# Altium PCB MasterRelayModule.PcbDoc
Units mil, origin at the board's own origin, x right, y up, seen from the top; angles counter-clockwise.
Board outline 2917.32 x 2165.35 mil, 2 copper layers (Top Layer, Bottom Layer); 52 components, 45 nets, 197 pads, 35 vias.
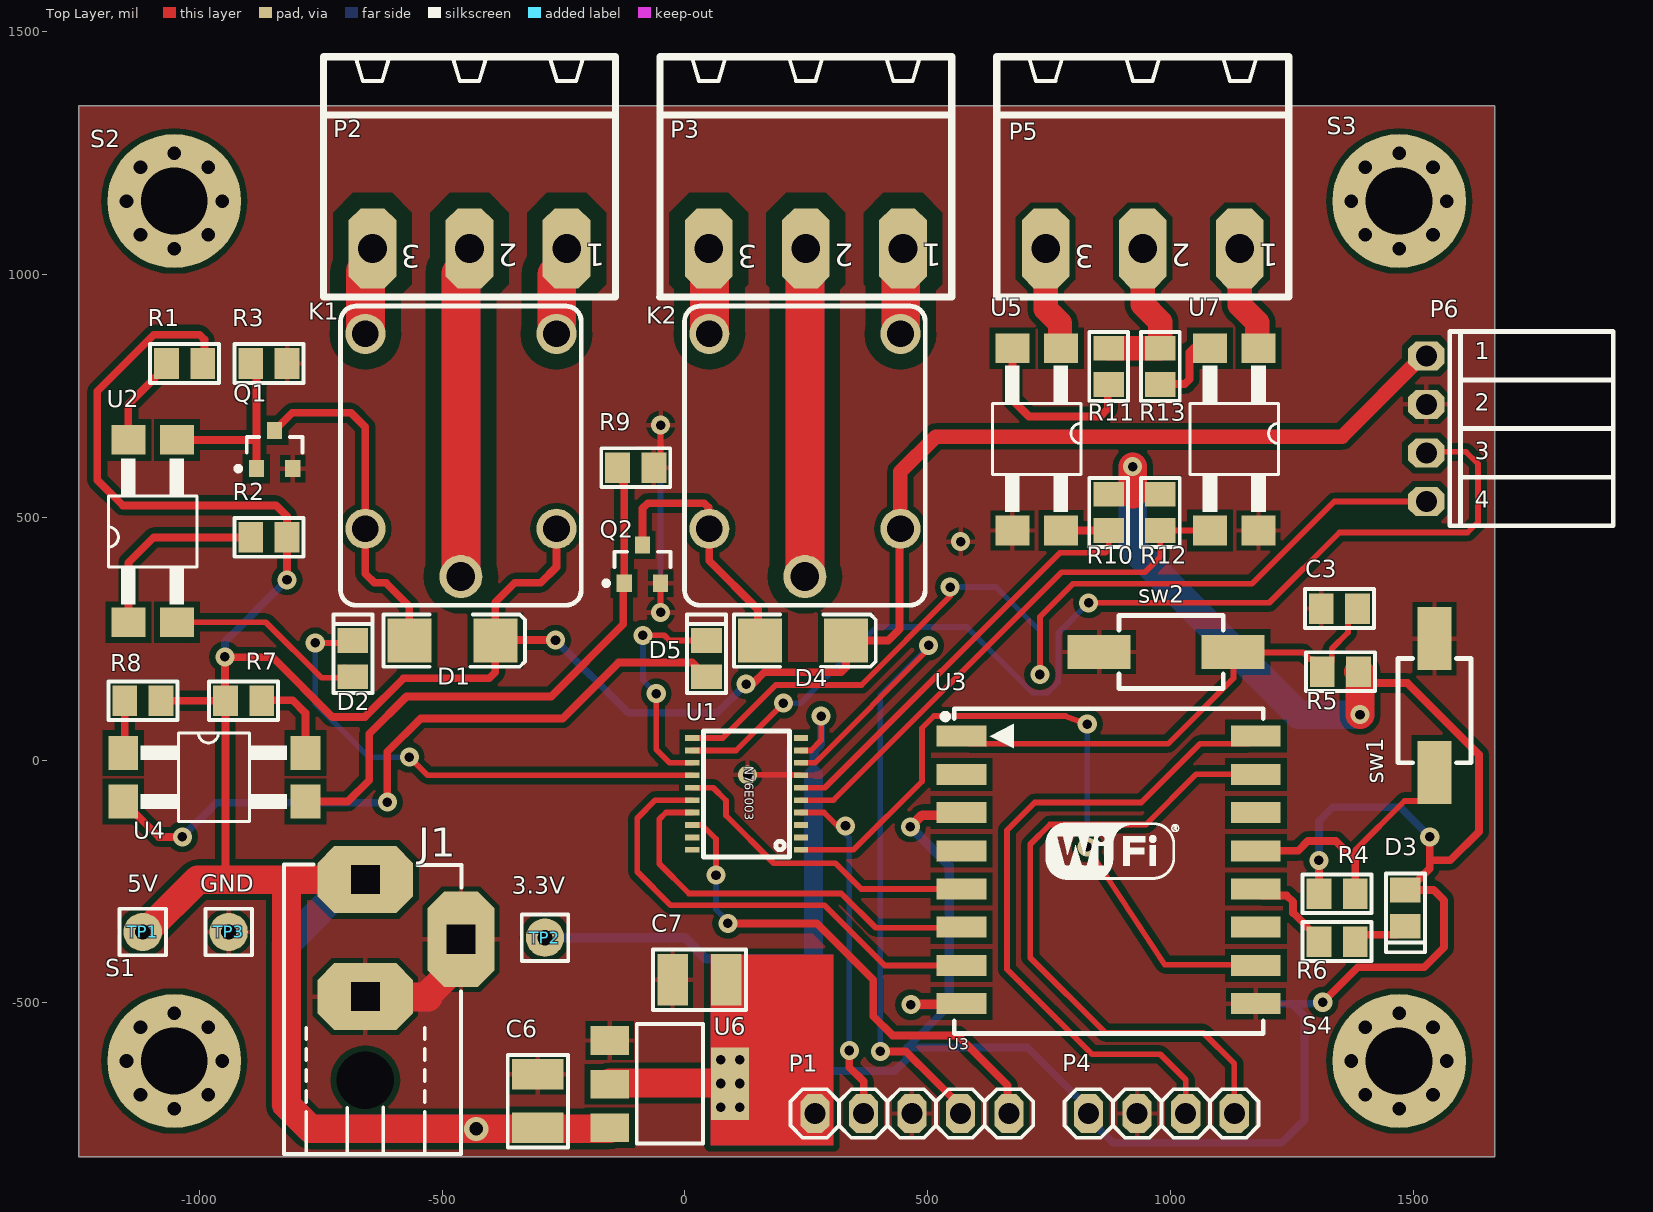
[diagram p0: Top Layer view]
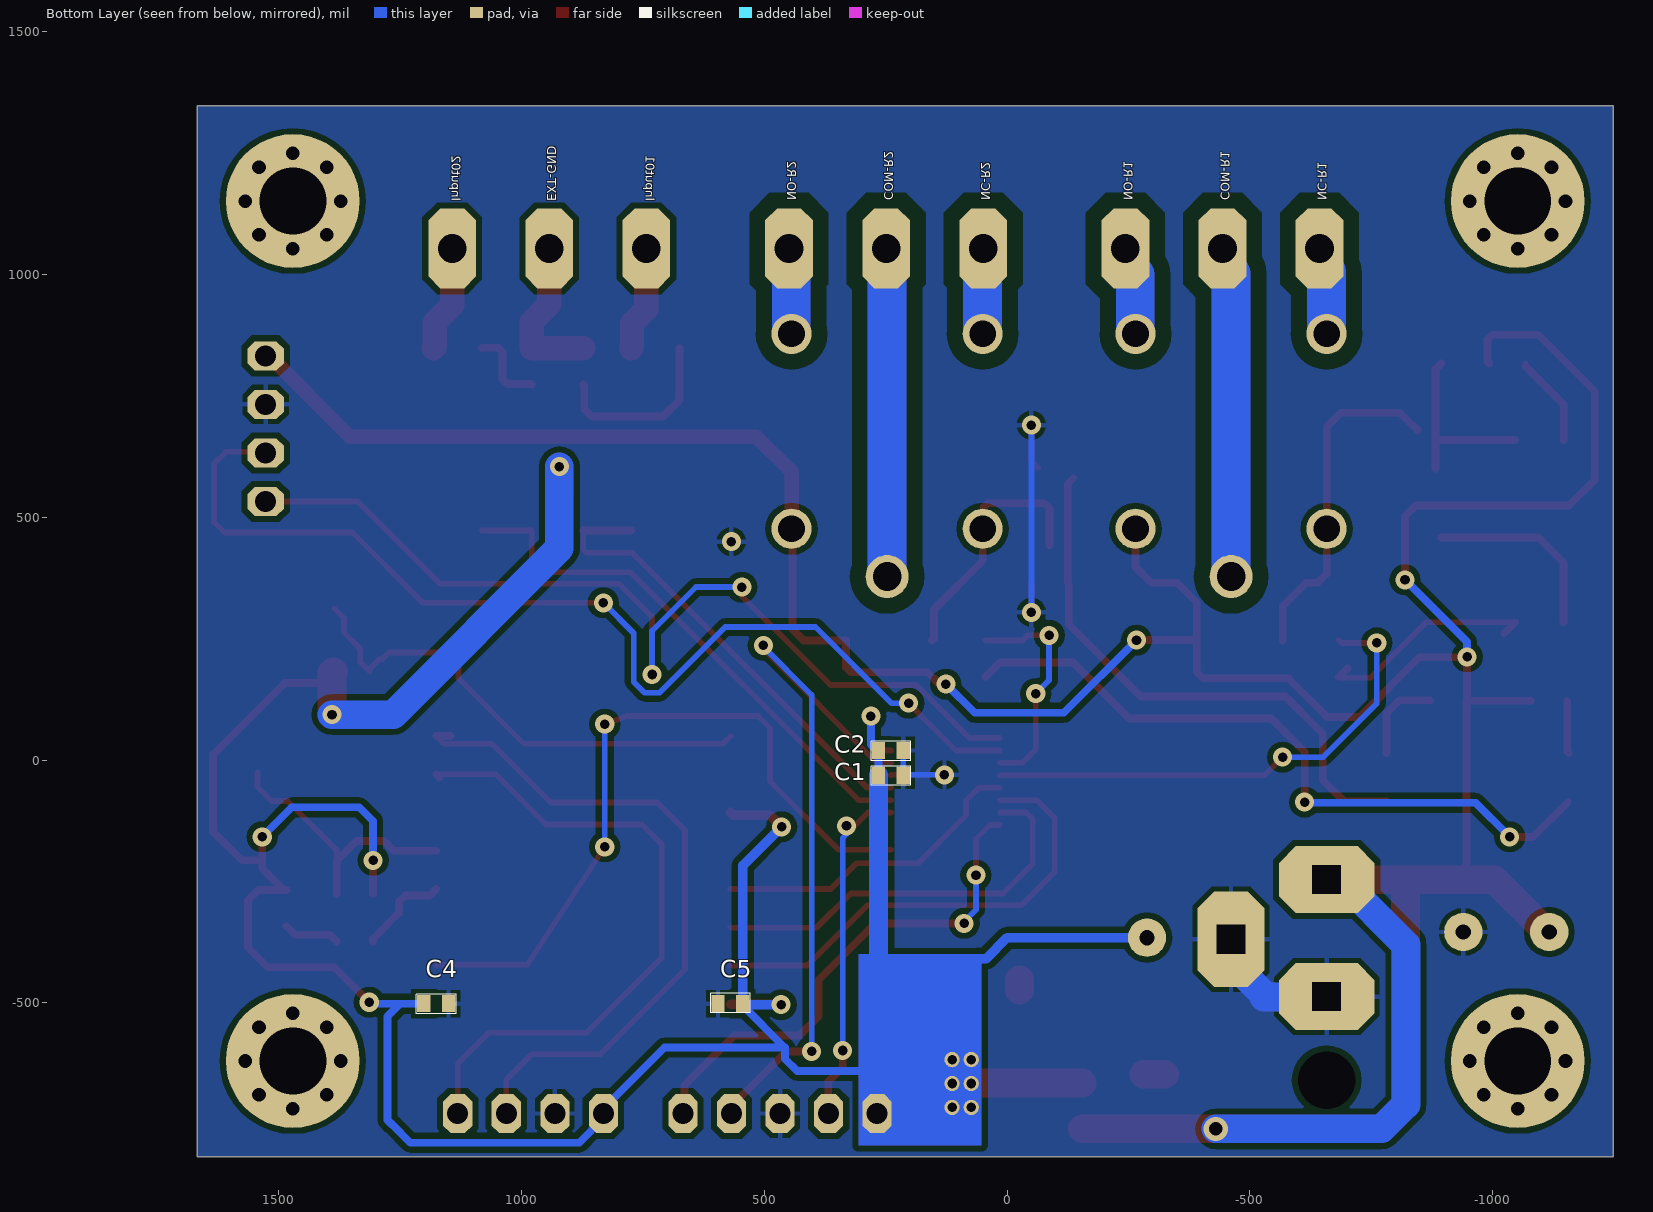
[diagram p1: Bottom Layer view, seen from below]
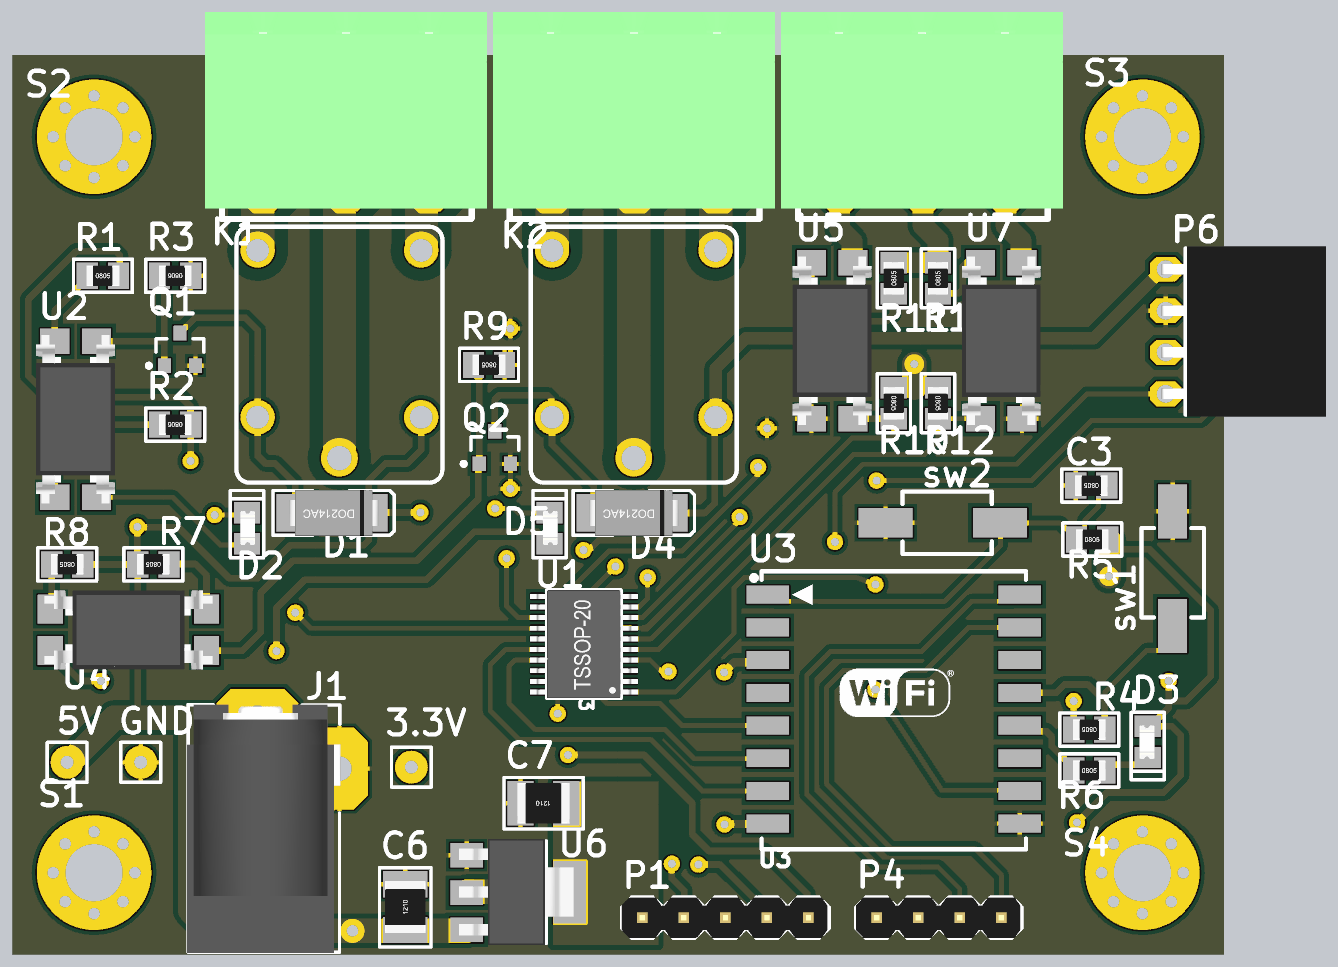
[diagram p2: 3D render of the assembled board from above, using the file's embedded part models]
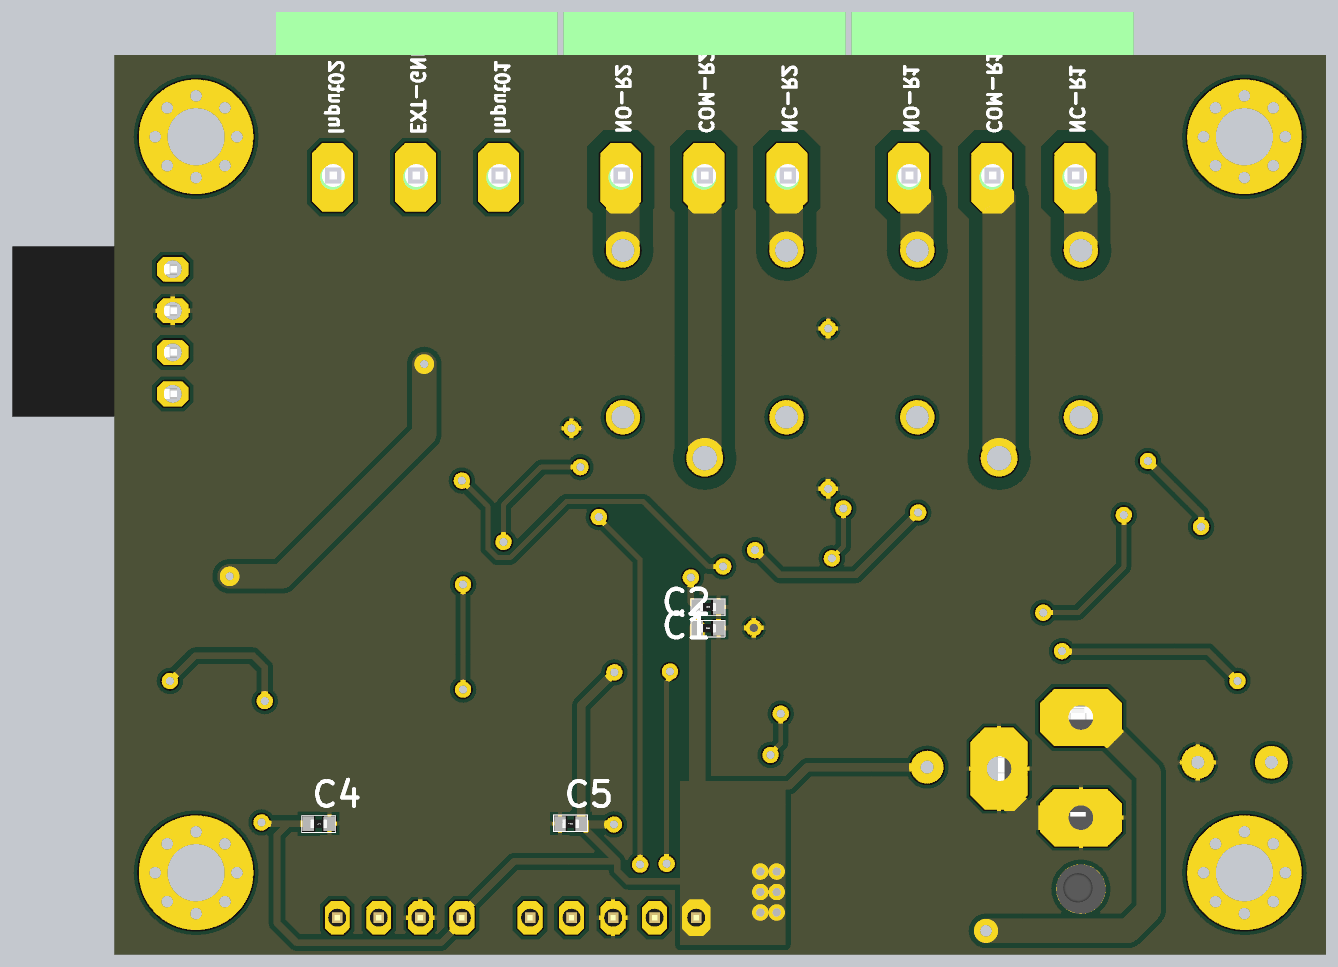
[diagram p3: 3D render of the assembled board from below, using the file's embedded part models]

## Layer stack, top to bottom
Top Solder: solder mask 0.4, Solder Resist, Dk 3.5
Top Layer: signal copper 1.4
Dielectric 1: dielectric 12.6, FR-4, Dk 4.8
Bottom Layer: signal copper 1.4
Bottom Solder: solder mask 0.4, Solder Resist, Dk 3.5

## Board outline
-1249.02,-816.93 1668.31,-816.93 1668.31,1348.43 -1249.02,1348.43

## Design rules (kind name [scope] priority, off if disabled: settings)
Clearance "Schematic Clearance Constraint_5" [InNet('CommonPointRelay1')] p1: gap=32 ignorepadtopadclearanceinfootprint=FALSE
Clearance "Schematic Clearance Constraint_4" [InNet('NO Relay01')] p2: gap=32 ignorepadtopadclearanceinfootprint=FALSE
Clearance "Schematic Clearance Constraint_3" [InNet('CommonPointRelay2')] p3: gap=32 ignorepadtopadclearanceinfootprint=FALSE
Clearance "Schematic Clearance Constraint_2" [InNet('NO Relay02')] p4: gap=32 ignorepadtopadclearanceinfootprint=FALSE
Clearance "Schematic Clearance Constraint_1" [InNet('NC Relay02')] p5: gap=32 ignorepadtopadclearanceinfootprint=FALSE
Clearance "Schematic Clearance Constraint" [InNet('NC Relay01')] p6: gap=32 ignorepadtopadclearanceinfootprint=FALSE
Clearance [All] p7: gap=12 ignorepadtopadclearanceinfootprint=FALSE
HoleSize [All] p1: absolutevalues=TRUE maxlimit=1000 minlimit=1 maxpercent=80.000 minpercent=20.000
MinimumSolderMaskSliver [All] p1: minsoldermaskwidth=5
PolygonConnect [All] p1: connectstyle=Relief reliefconductorwidth=10 reliefentries=4 polygonreliefangle="90 Angle" airgapwidth=10
RoutingVias [All] p1: holewidth=19.68 width=39.37 viastyle="Through Hole" minholewidth=19.68 minwidth=39.37 maxholewidth=39.37 maxwidth=118.11
SilkToSilkClearance [All] p1: silktosilkclearance=3
SilkToSolderMaskClearance [IsPad] p1: minsilkscreentomaskgap=3 clearancetoexposedcopper=TRUE
SolderMaskExpansion [All] p1: expansion=4
Width "Schematic Width Constraint_5" [InNet('CommonPointRelay1')] p1: maxlimit=1000 minlimit=80 preferedwidth=10
Width "Schematic Width Constraint_4" [InNet('CommonPointRelay2')] p2: maxlimit=1000 minlimit=80 preferedwidth=10
Width "Schematic Width Constraint_3" [InNet('NC Relay01')] p3: maxlimit=1000 minlimit=80 preferedwidth=10
Width "Schematic Width Constraint_2" [InNet('NC Relay02')] p4: maxlimit=1000 minlimit=80 preferedwidth=10
Width "Schematic Width Constraint_1" [InNet('NO Relay01')] p5: maxlimit=1000 minlimit=80 preferedwidth=10
Width "Schematic Width Constraint" [InNet('NO Relay02')] p6: maxlimit=1000 minlimit=80 preferedwidth=10
Width [All] p7: maxlimit=100 minlimit=11.81 preferedwidth=16
26 further rules are at their usual default settings.

## Components (designator, comment, footprint, x,y, rotation, side; value= is the part's Value field where it differs from the comment)
C1 "100nF" MY_0402 239.17,-31.5 r0 bottom
C2 "10nF" MY_0402 239.17,19.68 r0 bottom
C3 "100nF" MY_0805 1348.43,312.01 r180 top
C4 "100nF" MY_0402 1176.18,-501.97 r0 bottom
C5 "10nF" MY_0402 569.88,-501.97 r180 bottom
C6 "10uF" MY_1210 -303.15,-702.73 r90 top
C7 "100uF" MY_1210 29.53,-452.76 r180 top
D1 "1N4007" MY_1N4007_SMD -481.3,246.06 r0 top
D2 "LED" MY_LED_0805 -681.06,209.06 r270 top
D3 "LED" MY_LED_0805 1481.3,-305.12 r90 top
D4 "1N4007" MY_1N4007_SMD 241.05,246.06 r0 top
D5 "LED" MY_LED_0805 47.29,209.06 r270 top
J1 "DC_Jack" DC_Jack -460.46,-216.45 r180 top
K1 "Relay-SPDT" MY_Songle -461.61,635.83 r270 top
K2 "Relay-SPDT" MY_Songle 247.05,635.83 r270 top
P1 "Header 5" My_1X05 467.52,-728.35 r0 top
P2 "Header 3" MY_MSTBA3 -445.87,1190.94 r180 top
P3 "Header 3" MY_MSTBA3 247.05,1190.94 r180 top
P4 "Header 4" My_1X04 981.69,-728.35 r0 top
P5 "Header 3" MY_MSTBA3 941.11,1190.94 r180 top
P6 "Header 4" MY_FE04W 1527.56,682.68 r270 top
Q1 "BC817-40LT1G" ONSC-SOT-23-3-318-08_V -845.47,639.76 r90 top
Q2 "BC817-40LT1G" ONSC-SOT-23-3-318-08_V -87.6,403.54 r90 top
R1 "1K" MY_0805 -1030.91,816.93 r0 top
R2 "1K" MY_0805 -857.09,458.66 r180 top
R3 "1K" MY_0805 -857.09,816.93 r180 top
R4 "1K" MY_0805 1343.5,-275.59 r180 top
R5 "1K" MY_0805 1350.39,182.09 r0 top
R6 "330R" MY_0805 1343.5,-374.02 r0 top
R7 "1K" MY_0805 -909.45,122.05 r180 top
R8 "1K" MY_0805 -1116.8,122.05 r180 top
R9 "1K" MY_0805 -101.38,602.36 r180 top
R10 "220R" MY_0805 873.03,510.24 r270 top
R11 "220R" MY_0805 873.03,811.02 r90 top
R12 "220R" MY_0805 979.33,510.24 r270 top
R13 "220R" MY_0805 979.33,811.02 r90 top
S1 "Screw" MY_PAD_3MM -1052.17,-620.08 r0 top net-tie
S2 "Screw" MY_PAD_3MM -1052.17,1151.57 r0 top net-tie
S3 "Screw" MY_PAD_3MM 1471.46,1151.57 r0 top net-tie
S4 "Screw" MY_PAD_3MM 1471.46,-620.08 r0 top net-tie
sw1 "Tac switch" MY_PB-SMD 1544.29,-25.59 r90 top
sw2 "Tac switch" MY_PB-SMD 1128.94,222.44 r180 top
TP1 "5V" MY_TestPin -1117.13,-354.33 r0 top
TP2 "3.3V" MY_TestPin -288.39,-365.92 r0 top
TP3 "GND" MY_TestPin -939.96,-354.33 r0 top
U1 "N76E003" TSSOP-20 215.55,-199.8 r180 top
U2 "Optoisolator" MY_OPTO_SMD4-7 -1096.8,471.65 r0 top
U3 "ESP07" "ESP8266 ESP_7" 554.78,-563.71 r0 top (schematic designator *)
U4 "Optoisolator" MY_OPTO_SMD4-7 -969.49,-35.43 r270 top
U5 "Optoisolator" MY_OPTO_SMD4-7 724.61,660.63 r180 top
U6 "LM1117- 3.3V Fixed" MY_SOT223 -28.54,-666.5 r270 top
U7 "Optoisolator" MY_OPTO_SMD4-7 1131.69,660.63 r180 top

## Footprints (in the part's own frame and the unit in brackets; to place one, negate y for a bottom-side part, rotate by r counter-clockwise, add the part's x,y. Pads: shape width x height; smd on the part's side, far side on the other; paste and mask are expansions set on the pad)
DC_Jack [mm]
  round 0 hole 3: 0(5.029,11.252)
  oct 5x3.5 hole 1.5 square: 1(5.029,0.762) 3(5.029,6.883)
  oct 3.5x5 hole 1.5 square: 2(0.025,3.886)
  silkscreen extent 0,-0.03 9.28,15.12, body extent -0.05,-0.03 9.35,15.17, height 11.02
"ESP8266 ESP_7" [mm]
  rect 2.6x1.1 smd: 1(0.384,15.568) 2(0.384,13.568) 3(0.384,11.568) 4(0.384,9.568) 5(0.384,7.568) 6(0.384,5.568) 7(0.384,3.568) 8(0.384,1.568) 9(15.784,1.568) 10(15.784,3.568) 11(15.784,5.568) 12(15.784,7.568) 13(15.784,9.568) 14(15.784,11.568) 15(15.784,13.568) 16(15.784,15.568)
  silkscreen extent -0.62,0 16.17,17
MY_1N4007_SMD [mm]
  rect 2.3x2.3 smd: A(-2.199,0) K(2.301,0)
  silkscreen extent -3.56,-1.37 3.86,1.37, body extent -2.59,-1.4 2.9,1.4, height 2.3
My_1X04 [mil]
  oct 60x80 hole 43.31: 1(-150,0) 2(-50,0) 3(50,0) 4(150,0)
  silkscreen extent -200,-50 200,50, body extent -200,-49 196,49, height 323
My_1X05 [mil]
  oct 60x80 hole 43.31: 1(-200,0) 2(-100,0) 3(0,0) 4(100,0) 5(200,0)
  silkscreen extent -250,-50 250,50, body extent -250,-49 246,49, height 323
MY_0402 [mm]
  rect 0.7x0.9 smd: 1(-0.65,0) 2(0.65,0)
  silkscreen extent -1.04,-0.48 1.04,0.53, body extent -0.5,-0.25 0.5,0.25, height 0.34
MY_0805 [mm]
  rect 1.3x1.6 smd: 1(-0.95,0) 2(0.95,0)
  silkscreen extent -1.8,-1.02 1.8,1.02, body extent -1,-0.62 1,0.63, height 0.59
MY_1210 [mm]
  rect 1.6x2.7 smd: 1(-1.4,0) 2(1.4,0)
  silkscreen extent -2.44,-1.57 2.41,1.57, body extent -1.6,-1.25 1.6,1.25, height 0.59
MY_FE04W [mil]
  oct 60x75 hole 43.31: 1(-150,0) 2(-50,0) 3(50,0) 4(150,0)
  silkscreen extent -200,48 200,385, body extent -205,-10 205,386, height 99
MY_LED_0805 [mm]
  rect 1.3x1.6 smd: A(0.95,-0.076) K(-0.95,-0.076)
  silkscreen extent -2.31,-1.09 1.8,0.94, body extent -1.06,-0.48 1.01,0.42, height 0.86
MY_MSTBA3 [mil]
  oct 98.43x165.01 hole 59.06: 1(-202,137) 2(-2,137) 3(198,137)
  silkscreen extent -303,-258 299,237, body extent -339,-261 339,212, height 339
MY_OPTO_SMD4-7 [mm]
  rect 1.78x1.55 smd: 1(-1.27,-4.77) 2(1.27,-4.77) 3(1.27,4.77) 4(-1.27,4.77)
  silkscreen extent -2.32,-3.85 2.31,3.8, body extent -2.41,-5.14 2.41,5.14, height 5.6
MY_PAD_3MM [mil]
  round 50 hole 28: 0(-98.43,0) 0(-69.6,-69.6) 0(-69.6,69.6) 0(0,-98.43) 0(0,98.43) 0(69.6,-69.6) 0(69.6,69.6) 0(98.43,0)
  round 275.59 hole 137.8: 0(0,0)
MY_PB-SMD [mil] "Switch; 2 Leads"
  rect 130x70 smd: 1(0,0) 2(275.59,0)
  silkscreen extent 20,-75 235,75
MY_Songle [mm]
  round 2.25 hole 1.5: 1(6.55,0)
  round 2.1 hole 1.4: 2(-6.15,-5) 3(-6.15,5) 4(4.05,5) 5(4.05,-5)
  silkscreen extent -7.6,-6.3 8.05,6.3
MY_SOT223 [mm]
  rect 1.499x2.007 smd: 1(-2.252,-3.218) 2(0.034,-3.218) 3(2.32,-3.218)
  round 0.8 hole 0.5: 2(-1.25,3.6) 2(-1.25,2.6) 2(0,3.6) 2(0,2.6) 2(1.25,3.6) 2(1.25,2.6)
  rect 3.81x2.007 smd: 2(0.009,3.081)
  silkscreen extent -3.12,-1.8 3.13,1.66, body extent -3.25,-3.68 3.25,3.32, height 1.67
MY_TestPin [mil]
  round 79 hole 31.5: 1(0,0)
  silkscreen extent -48,-48 48,48
ONSC-SOT-23-3-318-08_V [mm] "SOT23, 3-Leads, Body 2.92x1.3mm, Pitch 0.95mm"
  rect 0.9x0.8 smd: 1(-1,0.95) 2(-1,-0.95) 3(1,0)
  silkscreen extent -1.12,-1.46 0.65,2.02, body extent -0.65,-1.46 0.65,1.46, height 1.11
TSSOP-20 [mm]
  rect 0.75x0.3 smd: 1(-0.6,-0.375) 2(-0.6,-1.025) 3(-0.6,-1.675) 4(-0.6,-2.325) 5(-0.6,-2.975) 6(-0.6,-3.625) 7(-0.6,-4.275) 8(-0.6,-4.925) 9(-0.6,-5.575) 10(-0.6,-6.225) 11(5.1,-6.225) 12(5.1,-5.575) 13(5.1,-4.925) 14(5.1,-4.275) 15(5.1,-3.625) 16(5.1,-2.975) 17(5.1,-2.325) 18(5.1,-1.675) 19(5.1,-1.025) 20(5.1,-0.375)
  silkscreen extent 0,-6.6 4.5,0, body extent -1.05,-6.6 5.55,0, height 1.2

## Part data
C1 C2 C3 C4 C5 C6 C7: library part "Cap ceramic", "None polar capacitor", ASiD Part Number=C-AS, Volte=50v
D1 D4: "1 Amp Diode", ASiD Part Number=1n4007-AS
D2 D3 D5: "Typical INFRARED GaAs LED", ASiD Part Number=LED-AS
J1: PackageDocument=2003, ComponentLink1Description="Manufacturer Link", ComponentLink1URL=http://www.cliffuk.co.uk/, DatasheetDocument=2003, DrillAndSlotSize="Corresponds to nominal value.", LatestRevisionDate=15-Jul-2004, LatestRevisionNote="Component Replaced & renamed from \"Phonejack\".", PackageReference=S1VS_SNB, PCB_Layout="Complies with manufacturer's recommendation.", Publisher="Altium Limited"
K1 K2: "Standard single contact relay", ASiD Part Number=Relay-SPDT-AS
P1: "Header, 5-Pin", ASiD Part Number="Header 5-AS"
P2 P3 P5: "Header, 3-Pin", ASiD Part Number="Header 3-AS"
P4 P6: "Header, 4-Pin", ASiD Part Number="Header 4-AS"
Q1 Q2: library part CMP-1048-00019-1, "General Purpose Transistor, NPN Silicon, 3-Pin SOT-23, Pb-Free, Tape and Reel", Manufacturer="On Semiconductor", ComponentLink1Description="Manufacturer URL", ComponentLink1URL=http://www.onsemi.com/, ComponentLink2Description=Datasheet, ComponentLink2URL=http://www.onsemi.com/pub_link/Collateral/BC817-16LT1-D.PDF, ComponentLink3Description="Package Specification", ComponentLink3URL=http://www.onsemi.cn/pub_link/Collateral/318-08.PDF, DatasheetVersion="Rev. 12", fT Min (MHz)=100, IC Continuous (A)=0.5, Mounting Technology="Surface Mount", PackageDescription="3-Pin Small Outline Transistor, Body 2.92 x 1.3 mm, Pitch 0.95 mm", PackageReference=SOT-23-3-318-08, PackageVersion="Rev. AP, 11/2009", Packing="Tape and Reel", PartNumber=BC817-40LT1G, Polarity=NPN, RoHS=TRUE
R1 R2 R3 R4 R5 R6 R7 R8 R9 R10 R11 R12 R13: library part Res, "Standard resistor", ASiD Part Number=Res-AS
S1 S2 S3 S4: "3mm Screw", ASiD Part Number=Screw-AS
sw1 sw2: "small tac switch", ASiD Part Number="Tac switch-AS"
TP1 TP2 TP3: library part "Test Point", "Test point", ASiD Part Number="Test Point-AS"
U2 U4 U5 U7: ASiD Part Number=Optoisolator-AS
U6: library part LM1117, "Low Drop Voltage Reg", ASiD Part Number=LM1117-AS

## Via types
v1: diameter 39.37, hole 19.68, Top Layer to Bottom Layer, 34 vias
v2: diameter 50, hole 28, Top Layer to Bottom Layer, 1 vias

## Nets (pads, with @x,y where several pads share a name; then routed paths per layer and width w, separated by ;. In a path a pad name is that pad's centre, name@x,y a point inside that pad or via, vN(x,y) a via of type N, cw(c..) or ccw(c..) an arc to the next point about the centre after c; other vN are vias at no path point)
3.3V: C1.2 C2.2 C4.2 C5.2 C7.1 D3.A P1.1 P4.1 R4.2 R5.2 R10.1 R12.1 TP2.1 U1.9 U3.3 U3.8 U6.2 | length 6319.1
  Top Layer w11.81: U1.9 259.57,19.68 280.51,40.62 v1(280.51,90.55)
  Top Layer w16: v1(465.55,-503.94) v1@466.54,-502.95 ; U3.8@568.9,-502.95 U3.8 ; R4.2 v1(1306.1,-206.69) ; v1(1313.98,-499.02) 1386.09,-426.9 1522.91,-426.9 1563.98,-385.83 1563.98,-289.37 1542.32,-267.72 D3.A@1490.2,-267.72 ; R5.2@1405.39,158.59 1488.39,158.59 1635.83,11.16 1635.83,-147.64 1576.77,-206.69 1534.45,-206.69 ; D3.A D3.A@1490.2,-267.72 ; v1(1534.45,-158.46) 1534.45,-206.69 ; D3.A@1490.2,-267.72 1534.45,-223.47 1534.45,-206.69
  Top Layer w20: v1(464.57,-137.8) 488.7,-113.66 564.49,-113.66 U3.3 ; v1@466.54,-502.95 U3.8@568.9,-502.95
  Top Layer w59: TP2.1 TP2.1@-282.97,-365.92 ; U6.2@-155.23,-665.35 79.34,-665.35 92.77,-651.92 U6.2@92.77,-616.42 ; 922.24,547.64 v1(922.24,604.33) ; R5.2 1388.75,182.09 1390.75,180.09 v1(1390.75,93.5)
  Bottom Layer w16: 193.9,-640.75 432.09,-640.75 457.68,-615.16 457.68,-592.52 ; C1.2 264.76,10.22 267.72,13.17 264.76,16.13 280.51,31.87 v1(280.51,90.55) ; C5.2@542.32,-503.94 C5.2 544.29,-505.91 457.68,-592.52 ; C4.2 1250,-501.97 ; v1(1306.1,-206.69) 1306.1,-125.98 1334.65,-97.44 1473.43,-97.44 v1(1534.45,-158.46) ; v1(1313.98,-499.02) 1311.02,-501.97 1250,-501.97 ; 457.68,-592.52 705.87,-592.52 831.69,-718.35 P4.1 831.69,-738.35 881.69,-788.35 1229.37,-788.35 1266.73,-750.98 1267.2,-750.98 1276.57,-741.61 1276.57,-528.54 1250,-501.97
  Bottom Layer w20: TP2.1 -0.22,-365.92 43.46,-409.61 62.17,-409.61 86.61,-434.06 86.61,-452.76 ; v1(464.57,-137.8) 544.29,-217.52 C5.2 ; v1(465.55,-503.94) C5.2@542.32,-503.94
  Bottom Layer w40: 264.76,-458.66 C1.2
  Bottom Layer w59: v1(922.24,604.33) 922.24,436.02 1264.76,93.5 v1(1390.75,93.5)
5V: C6.1 D1.K D4.K J1.1 K1.4 K2.4 P6.1 R1.2 R2.1 R7.2 R8.1 TP1.1 U6.3 | length 7985.4
  Top Layer w11.81: C6.1@-304.13,-740.93 C6.1@-302.14,-742.92 ; K2.4@441.93,474.41 K2.4 ; P6.1@1520.06,832.68 P6.1
  Top Layer w16: R8.1 R7.2 ; R1.2 -990.16,820.28 -990.16,866.14 -1000,875.98 -1094.62,875.98 -1210.63,759.98 -1210.63,576.77 -1158.46,524.61 -842.52,524.61 -819.88,501.97 -819.88,458.86 R2.1 -819.69,371.26 v1(-819.88,371.06) ; -945.87,-246.45 -946.85,-245.46 R7.2 ; D1.K -390.75,181.1 -403.54,168.31 -579.72,168.31 -659.45,88.58 -726.38,88.58 -849.41,211.61 -946.85,211.61 v1(-947.83,212.6) -947.83,123.03 R7.2 ; v1(-266.73,247.05) -389.73,247.05 D1.K -390.72,324.83 -350.39,365.16 -297.24,365.16 -264.76,397.64 K1.4 ; v1(125.98,156.5) 139.26,156.5 163.55,180.79 321.54,180.79 331.63,190.88 D4.K 418.31,246.06 441.93,269.68 K2.4@441.93,474.41
  Top Layer w30: K2.4 443.9,593.5 516.73,666.34 1353.72,666.34 P6.1@1520.06,832.68
  Top Layer w59: TP1.1 -1111.71,-354.33 -1003.83,-246.45 -945.87,-246.45 -820.87,-246.45 ; J1.1@-687.99,-246.45 -820.87,-246.45 ; U6.3@-155.23,-760 v2(-430.12,-760) -771.49,-760 -820.87,-710.63 -820.87,-246.45
  Bottom Layer w16: v1(-947.83,212.6) -947.83,243.11 v1(-819.88,371.06) v1@-816.93,371.06 ; v1(-266.73,247.05) -116.81,97.13 66.61,97.13 v1(125.98,156.5)
  Bottom Layer w59: J1.1 -687.99,-246.45 -821.85,-380.31 -821.85,-709.65 -771.49,-760 v2(-430.12,-760)
CommonPointRelay1: K1.1 P2.2 | length 1307.1
  Top Layer w80: K1.1 -461.61,1001.73 -443.87,1019.48 P2.2
  Bottom Layer w80: K1.1 P2.2@-461.61,1001.73
CommonPointRelay2: K2.1 P3.2 | length 1247.6
  Top Layer w80: K2.1 P3.2@247.05,1001.73
  Bottom Layer w80: K2.1 P3.2@247.05,1001.73
ESP_Reset: C3.1 R5.1 sw2.1 U3.1 | length 1038.7
  Top Layer w11.81: U3.1 585.63,33.46 689.78,33.46 689.97,33.28 994.89,33.28 1129.92,168.31 1129.92,221.46 1273.62,221.46 1287.4,207.68 1293.31,207.68 1312.99,187.99 R5.1 1332.68,201.77 1332.68,229.33 1366.14,262.8 1366.14,292.32 C3.1
ESP_RXD: P4.4 U3.15 | length 1380.9
  Top Layer w11.81: P4.4 1131.89,-728.15 1131.89,-625.98 1067.91,-562.01 866.14,-562.01 711.43,-407.29 711.43,-173.42 751.78,-133.06 949.61,-133.06 1053.15,-29.53 U3.15
  Top Layer w16: U3.15@1169.67,-36.04 U3.15
ESP_TXD: P4.3 U3.16 | length 1441.3
  Top Layer w11.81: P4.3 1031.69,-658.66 979.33,-606.3 838.58,-606.3 663.39,-431.1 663.39,-144.68 720.47,-87.6 940.17,-87.6 1061.23,33.46 1160.43,33.46 U3.16
  Top Layer w16: U3.16@1146.65,49.21 U3.16
GND: C1.1 C2.1 C3.2 C4.1 C5.1 C6.2 C7.2 J1.2 J1.3 P1.3 P4.2 P6.2 Q1.2 Q2.2 R3.1 R9.1 sw1.2 sw2.2 TP3.1 U1.7 U3.9 U5.3 U6.1 U7.4 | length 1435.4
  Top Layer w11.81: R9.1 -50.2,616.14 v1(-50.2,689.96) ; v1(-50.2,304.13) Q2.2 ; v1(128.94,-30.51) 238.19,-30.51 U1.7
  Top Layer w59: J1.3 -657.72,-488.19 -528.54,-488.19 -528.54,-483.22 -461.46,-416.14 J1.2 J1.2@-439.23,-391.68 ; C6.2@-324.8,-647.62 C6.2 C6.2@-281.5,-647.62 ; C7.2@-25.58,-474.41 C7.2
  Bottom Layer w11.81: v1(-50.2,304.13) v1(-50.2,689.96) ; v1(128.94,-30.51) 212.6,-30.51 C1.1 C2.1
  Bottom Layer w59: J1.3 -657.72,-488.19 -529.53,-488.19 -529.53,-484.21 -461.46,-416.14 J1.2
  other v1: 567.91,449.8
HSPI_CLK: U1.15 U3.5 | length 659.4
  Top Layer w11.81: U1.15 58.07,-57.09 84.65,-83.66 84.65,-114.17 183.07,-212.6 310.04,-212.6 363.19,-265.75 U3.5
HSPI_MISO: U1.17 U3.6 | length 843
  Top Layer w11.81: U1.17 -39.08,-108.27 -52.86,-122.05 -52.86,-213.88 8.06,-274.8 322.04,-274.8 392.91,-345.66 568.71,-345.66 U3.6
HSPI_MOSI: U1.16 U3.7 | length 987.1
  Top Layer w11.81: U1.16 -61.02,-82.68 -98.43,-120.08 -98.43,-230.31 -29.7,-299.04 287.23,-299.04 411.42,-423.23 U3.7
HSPICS: U1.1 U3.10 | length 1502.8
  Top Layer w11.81: U1.1 347.44,-185.04 488.19,-44.29 488.19,65.68 513.06,90.55 783.9,90.55 v1(828.74,73.82) ; v1(828.74,-179.13) 988.54,-421.61 1174.57,-421.61 U3.10
  Bottom Layer w11.81: v1(828.74,-179.13) v1(828.74,73.82)
Input01: R10.2 U1.6 U5.4 | length 974.7
  Top Layer w11.81: U1.6 288.17,-57.09 772,426.75 866,426.75 873.03,433.77 R10.2
  Top Layer w16: U5.4 R10.2
Input02: R12.2 U1.5 U7.3 | length 1104.6
  Top Layer w11.81: U1.5 306.16,-82.68 775.84,387 948.02,387 979.33,418.31 R12.2 U7.3
MCU_RXD: U1.3
MCU_TXD: U1.2
MCUSCL: P6.3 U1.12 | length 2222.3
  Top Layer w11.81: U1.12 105.32,19.68 v1(202.77,117.13) ; v1(831.69,323.82) 1203.74,323.82 1348.43,468.5 1612.2,468.5 1633.86,490.16 1633.86,610.24 1609.25,634.84 1529.72,634.84 P6.3
  Bottom Layer w11.81: v1(202.77,117.13) 238.18,117.13 394.86,273.81 580.51,273.81 715.73,138.59 746.87,138.59 768.89,160.61 768.89,261.02 v1(831.69,323.82)
MCUSDA: P6.4 U1.11 | length 1997.2
  Top Layer w11.81: U1.11 77.75,45.28 187.2,154.72 363.6,154.72 546.26,337.38 v1(546.26,356.3) ; v1(731.3,176.18) 731.3,295.29 799.2,363.19 1168.31,363.19 1337.8,532.68 P6.4
  Bottom Layer w11.81: v1(546.26,356.3) 640.75,356.3 731.3,265.75 v1(731.3,176.18)
"NC Relay01": K1.2 P2.3 | length 309
  Top Layer w80: K1.2 -657.95,878.46 -657.95,1005.39 -643.87,1019.48 P2.3
  Bottom Layer w80: K1.2@-657.95,878.46 P2.3@-657.95,1005.39
"NC Relay02": K2.2 P3.3 | length 253.9
  Top Layer w80: K2.2@50.71,878.46 P3.3@50.71,1005.39
  Bottom Layer w80: K2.2@50.71,878.46 P3.3@50.71,1005.39
NetD1_A: D1.A K1.5 Q1.3 | length 706.8
  Top Layer w16: Q1.3 -845.47,681.1 -837.72,688.85 -835.76,688.85 -809.06,715.55 -687.99,715.55 -658.46,686.02 K1.5 -658.46,383.86 -639.76,365.16 -616.14,365.16 -567.88,316.9 D1.A
NetD2_A: D2.A U2.2 | length 467.9
  Top Layer w11.81: U2.2 -863.58,283.86 -749.02,169.29 -686.42,169.29 D2.A
  Top Layer w16: U2.2 U2.2@-1024.28,261.35 ; D2.A@-701.65,189.25 D2.A
NetD3_K: D3.K R6.2 | length 116.4
  Top Layer w16: R6.2 1394.81,-360.11 1466.71,-360.11 D3.K
NetD4_A: D4.A K2.5 Q2.3 | length 537.9
  Top Layer w16: Q2.3 -87.6,518.39 -76.77,529.21 39.69,529.21 48.23,520.67 48.23,478.35 K2.5 50.2,410.43 150.59,310.04 150.59,249.94 D4.A
NetD5_A: D5.A U4.2 | length 1454.1
  Top Layer w11.81: U4.2 U4.2@-1153.15,-89.57
  Top Layer w16: U4.2@-1153.15,-89.57 -1084.25,-158.46 v1(-1035.43,-158.46) ; v1(-613.19,-86.61) -613.19,16.75 -544.31,85.63 -251.97,85.63 -136.72,200.87 15.08,200.87 D5.A
  Bottom Layer w11.81: v1@-614.67,-88.09 v1(-613.19,-86.61)
  Bottom Layer w16: v1(-1035.43,-158.46) -965.06,-88.09 v1@-614.67,-88.09 ; v1@-613.73,-86.07 v1(-613.19,-86.61)
NetP5_1: P5.1 U7.1 | length 221.5
  Top Layer w50: P5.1 1143.11,937.6 1179.13,901.57 1179.13,850.98 U7.1
NetP5_2: P5.2 R11.2 R13.2 | length 326.8
  Top Layer w50: R11.2 R13.2 979.33,902.56 943.11,938.78 P5.2
NetP5_3: P5.3 U5.1 | length 218.6
  Top Layer w50: P5.3 743.11,929.13 772.64,899.61 772.64,850.39 U5.1
NetQ1_1: Q1.1 R3.2 U2.3 | length 385.7
  Top Layer w16: U2.3 -883.86,659.45 -882.87,658.46 ; R3.2 -882.87,805.31 -882.87,658.46 ; Q1.1 -882.87,658.46
NetQ2_1: Q2.1 R9.2 U4.3 | length 1168.6
  Top Layer w16: U4.3 -694.68,-85.43 -650.59,-41.34 -650.59,54.13 -573.82,130.91 -275.59,130.91 -126.97,279.53 -126.97,362.2 Q2.1 -125,569.09 R9.2@-136.61,580.71
NetR1_1: R1.1 U2.4 | length 190
  Top Layer w12: R1.1@-1068.31,811.02 R1.1
  Top Layer w16: U2.4 -1146.8,732.53 R1.1@-1068.31,811.02
NetR2_2: R2.2 U2.1 | length 396.5
  Top Layer w16: U2.1 -1146.65,284 -1146.65,406.5 -1094.49,458.66 R2.2
NetR4_1: R4.1 sw1.1 U3.13 | length 566.6
  Top Layer w11.81: 1380.91,-207.19 1380.91,-186.02 1482.24,-84.68 1515.2,-84.68 1544.29,-55.59 sw1.1
  Top Layer w16: U3.13 1263.22,-187.01 1283.22,-167.01 1340.72,-167.01 1380.91,-207.19 R4.1
NetR6_1: R6.1 U3.12 | length 191.5
  Top Layer w16: U3.12 1189.83,-279.4 1240.03,-279.4 1252.95,-292.32 1252.95,-314.96 1306.1,-368.11 R6.1
NetR7_1: R7.1 U4.4 | length 183.8
  Top Layer w16: R7.1 -871.06,123.03 -808.07,123.03 -781.69,96.65 U4.4
NetR8_2: R8.2 U4.1 | length 108.8
  Top Layer w16: U4.1 -1154.2,17.65 R8.2
NetR11_1: R11.1 U5.2 | length 374.8
  Top Layer w16: U5.2 674.61,741.73 708.66,707.68 855.32,707.68 871.06,723.43 871.06,771.65 R11.1
NetR13_1: R13.1 U7.2 | length 166.7
  Top Layer w16: R13.1 980.32,774.61 1029.53,774.61 1039.37,784.45 1039.37,840.04 1048.74,849.41 1080.71,849.41 U7.2
"NO Relay01": K1.3 P2.1 | length 305.3
  Top Layer w80: K1.3 -264.25,878.46 -264.25,999.09 -243.87,1019.48 P2.1
  Bottom Layer w80: K1.3@-264.25,878.46 P2.1@-264.25,999.09
"NO Relay02": K2.3 P3.1 | length 241.3
  Top Layer w80: K2.3@444.41,878.46 P3.1@444.41,999.09
  Bottom Layer w80: K2.3@444.41,878.46 P3.1@444.41,999.09
OCDCK: P1.5 U1.18 | length 1062.5
  Top Layer w11.81: U1.18 35.16,-133.86 63.98,-162.67 v1(63.98,-237.2)
  Top Layer w16: v1(88.59,-336.63) 271.67,-336.63 387.8,-452.76 387.8,-527.56 427.83,-567.6 561.69,-567.6 664.72,-670.63 664.72,-725.55 P1.5
  Bottom Layer w11.81: v1(63.98,-237.2) 63.98,-308.35 88.59,-332.96 v1(88.59,-336.63)
OCDDA: P1.4 U1.8 | length 1472.6
  Top Layer w11.81: U1.8 267.66,-5.91 501.97,228.41 v1(501.97,236.22)
  Top Layer w16: v1(402.56,-600.39) 454.66,-600.39 482.22,-627.95 482.28,-627.95 567.52,-712.2 P1.4
  Bottom Layer w11.81: v1(402.56,-600.39) 402.56,133.86 501.97,233.27 v1(501.97,236.22)
Relay1ControlPin: D2.K U1.14 | length 1042.7
  Top Layer w11.81: v1(-761.81,241.14) -689.38,241.14 D2.K ; v1(-567.91,5.91) -530.51,-31.5 U1.14
  Bottom Layer w11.81: v1(-761.81,241.14) -761.81,116.14 -651.57,5.91 v1(-567.91,5.91)
Relay2ControlPin: D5.K U1.13 | length 467.4
  Top Layer w11.81: v1(-86.61,256.89) -42.74,256.89 -31.91,246.06 43.89,246.06 D5.K ; v1(-59.06,136.81) -59.06,21.65 -31.5,-5.91 U1.13
  Bottom Layer w11.81: v1(-86.61,256.89) -86.61,164.37 v1(-59.06,136.81)
RST: P1.2 U1.4 | length 711.2
  Top Layer w11.81: U1.4 286.42,-108.27 313.98,-135.83 v1(330.71,-135.83) ; P1.2 P1.2@368.11,-727.76
  Top Layer w16: v1(338.6,-598.45) 338.6,-632.9 368.11,-662.42 P1.2@368.11,-727.76
  Bottom Layer w11.81: v1(330.71,-135.83) 330.71,-152.56 338.6,-160.45 v1(338.6,-598.45)
pads on no net: J1.0 S1.0 S2.0 S3.0 S4.0 U1.10 U1.19 U1.20 U3.2 U3.4 U3.11 U3.14

## Polygon pours and split planes (outlines as drawn)
GND on Top Layer "Top Layer-GND" (solid, remove dead copper, pour order 1): -1249.02,-816.93 1668.31,-816.93 1668.31,1348.43 -1249.02,1348.43
no net on Top Layer "Top Layer-No Net" (solid, remove dead copper, pour order 0): -1249.02,-816.93 1668.31,-816.93 1668.31,1348.43 -1249.02,1348.43
GND on Bottom Layer "GND_L02_P002" (solid, remove dead copper, pour order 2): -1249.02,-816.93 1668.31,-816.93 1668.31,1348.43 -1249.02,1348.43

## Other copper
Top Layer:
  rectangle net 3.3V: 52.17,-794.29 306.1,-400.59
Bottom Layer:
  rectangle net 3.3V: 52.17,-794.29 306.1,-399.61

## Silkscreen, mask and mechanical layers (free items; w line width, h text height)
Bottom Overlay:
  text "NC-R1" at -633.78,1153.54 h31.5 r90
  text "COM-R1" at -433.8,1153.54 h31.5 r90
  text "NO-R1" at -233.8,1153.54 h31.5 r90
  text "NC-R2" at 59.13,1153.54 h31.5 r90
  text "COM-R2" at 259.12,1153.54 h31.5 r90
  text "NO-R2" at 459.12,1153.54 h31.5 r90
  text "Input01" at 750.44,1151.57 h31.5 r90
  text "EXT-GND" at 953.18,1151.57 h31.5 r90
  text "Input02" at 1150.44,1151.57 h31.5 r90
Drill Drawing:
  the board outline again, w10

## Text inside footprints (layer, text, board x,y; h text height)
P2: Top Overlay "1" at -163.87,1078.94 h80 r180; Top Overlay "2" at -344.87,1078.94 h80 r180; Top Overlay "3" at -543.87,1075.94 h80 r180
P3: Top Overlay "1" at 529.05,1078.94 h80 r180; Top Overlay "2" at 348.05,1078.94 h80 r180; Top Overlay "3" at 149.05,1075.94 h80 r180
P5: Top Overlay "1" at 1223.11,1078.94 h80 r180; Top Overlay "2" at 1042.11,1078.94 h80 r180; Top Overlay "3" at 843.11,1075.94 h80 r180
P6: Top Overlay "1" at 1627.56,813.4 h60; Top Overlay "2" at 1627.56,707.68 h60; Top Overlay "3" at 1627.56,607.68 h60; Top Overlay "4" at 1627.56,507.68 h60